# Altium PCB Lily.PcbDoc
Units mm, origin at the board's own origin, x right, y up, seen from the top; angles counter-clockwise.
Board outline 70.74 x 108.65 mm, 2 copper layers (Top Layer, Bottom Layer); 12 components, 8 nets, 44 pads, 13 vias.
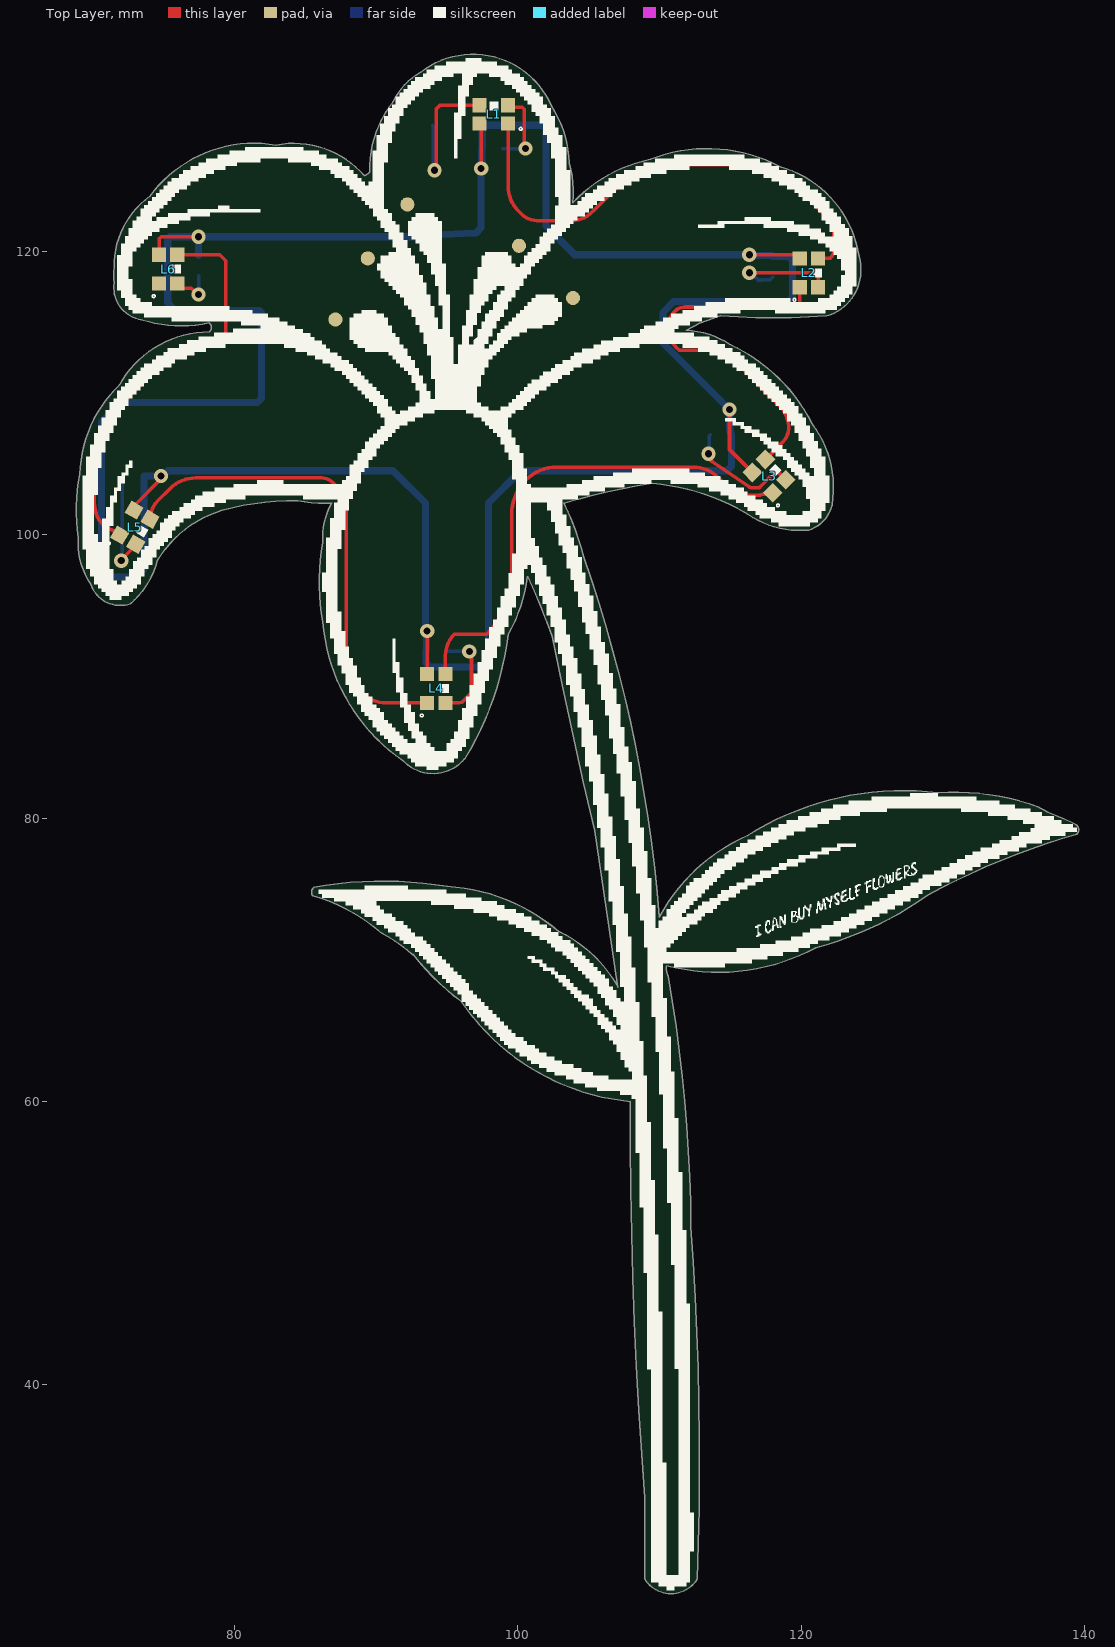
[diagram p0: Top Layer view]
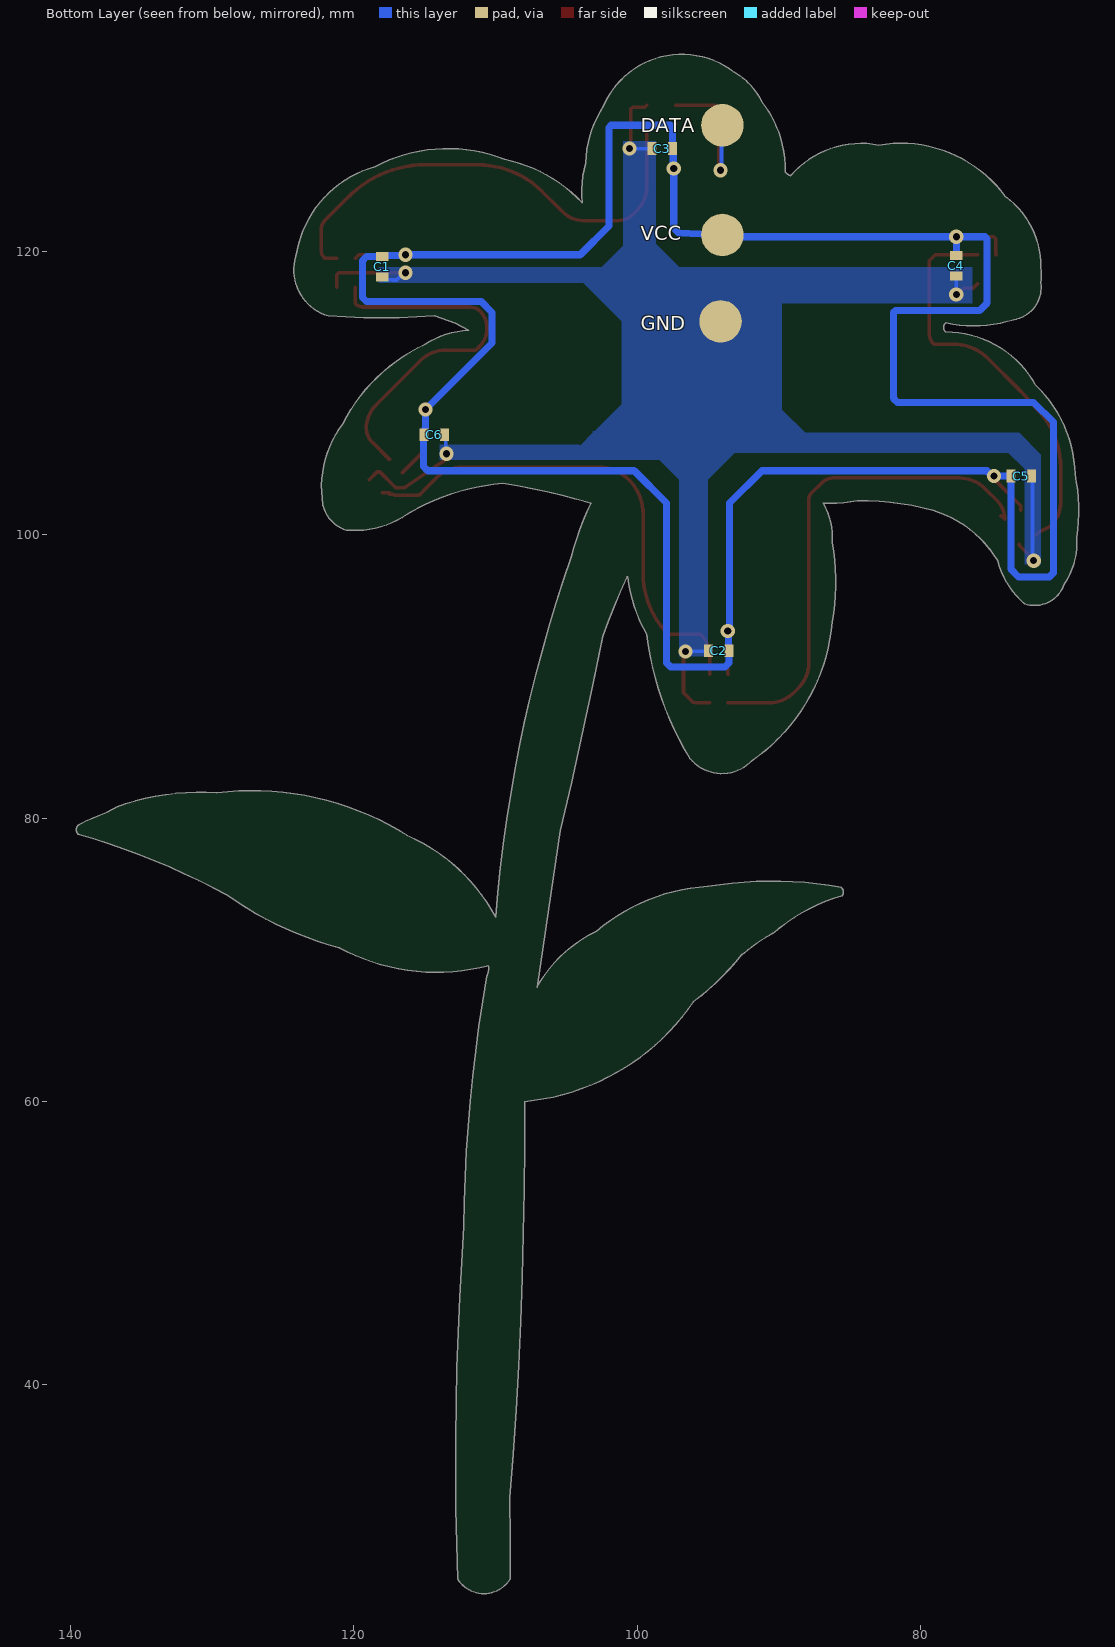
[diagram p1: Bottom Layer view, seen from below]

## Layer stack, top to bottom
Top Solder: solder mask 0.0102, Solder Resist, Dk 3.5
Top Layer: signal copper 0.0356
Dielectric 1: dielectric 0.32, FR-4, Dk 4.8
Bottom Layer: signal copper 0.0356
Bottom Solder: solder mask 0.0102, Solder Resist, Dk 3.5

## Board outline
85.518,74.523 cw(c85.862,74.774) 85.61,75.119 cw(c90.488,48.704) 94.996,75.184 cw(c94.223,61.915) 102.87,72.009 cw(c98.914,63.599) 107.061,68.072 cw(c1559.94,290.817) 105.41,79.121 cw(c553.166,184.365) 102.41,92.816 ccw(c55.463,76.322) 100.711,97.028 100.66,97.034 cw(c89.78,98.374) 99.314,92.964 cw(c77.758,95.55) 96.266,84.201 96.256,84.209 cw(c94.009,86.06) 91.896,84.057 cw(c99.341,94.896) 86.233,93.853 cw(c101.187,96.647) 86.233,99.441 cw(c91.109,99.802) 86.868,102.235 cw(c86.233,110.353) 84.458,102.406 ccw(c84.265,82.613) 79.121,101.727 ccw(c81.484,93.972) 74.549,98.171 cw(c68.669,99.727) 72.644,95.123 cw(c71.945,97.218) 69.85,96.52 cw(c74.267,99.465) 68.969,99.807 cw(c81.916,101.695) 69.087,104.267 cw(c78.156,104.025) 71.882,110.578 cw(c78.205,107.093) 78.203,114.312 ccw(c77.977,114.63) 78.203,114.947 cw(c76.264,124.185) 73.406,115.189 cw(c73.755,117.434) 71.51,117.783 cw(c75.692,118.364) 71.501,118.872 cw(c77.576,118.96) 74.012,123.881 cw(c81.408,118.473) 82.931,127.508 cw(c84.177,121.05) 89.154,125.349 ccw(c88.978,126.019) 89.532,125.603 cw(c97.395,125.729) 91.186,130.556 cw(c95.399,128.56) 93.129,132.632 cw(c96.84,127.906) 102.352,130.298 cw(c95.64,125.959) 103.627,126.238 cw(c96.218,124.142) 103.886,123.444 cw(c111.382,116.43) 109.347,126.492 cw(c113.371,116.367) 118.491,125.984 cw(c116.407,118.516) 124.079,119.634 cw(c120.841,118.681) 121.793,115.443 cw(c118.046,170.496) 114.3,115.443 ccw(c116.649,106.49) 111.887,114.427 cw(c111.688,108.534) 114.951,113.445 cw(c109.754,102.23) 120.777,107.823 cw(c114.769,103.326) 122.174,102.108 cw(c119.793,102.664) 120.523,100.33 cw(c119.904,106.753) 116.586,101.219 ccw(c108.198,88.185) 109.474,103.632 ccw(c117.061,55.275) 103.251,102.235 cw(c85.339,93.506) 104.648,98.425 cw(c8.909,65.06) 109.982,73.025 109.986,73.023 cw(c121.385,66.925) 116.217,78.775 cw(c127.144,61.524) 129.667,81.788 cw(c130.831,64.537) 136.779,80.772 136.807,80.745 cw(c131.939,71.49) 137.397,80.409 cw(c133.649,69.178) 139.446,79.502 cw(c139.129,79.184) 139.446,78.867 ccw(c153.411,29.75) 128.905,74.549 cw(c114.931,94.167) 121.031,70.866 cw(c114.163,83.49) 110.49,69.596 ccw(c111.697,69.406) 110.617,68.834 cw(c2.649,50.15) 112.217,51.149 cw(c-111.269,34.833) 112.649,26.289 cw(c110.807,27.432) 108.966,26.289 cw(c2666.348,27.872) 108.969,32.024 cw(c437.638,58.08) 107.943,59.999 cw(c109.47,76.196) 96.012,67.056 cw(c106.803,81.484) 92.613,70.382 92.583,70.358 ccw(c84.091,60.62) 90.424,71.882 90.408,71.863 ccw(c81.975,62.185)

## Design rules (kind name [scope] priority, off if disabled: settings)
Clearance [All] p1: gap=0.254 ignorepadtopadclearanceinfootprint=FALSE except(0: Arc-Hole Track-Hole SMDPad-Hole THPad-Hole Via-Hole Fill-Hole Poly-Hole Region-Hole Text-Hole)
PolygonConnect [All] p1: connectstyle=Direct reliefconductorwidth=0.254 reliefentries=4 polygonreliefangle="90 Angle" airgapwidth=0.254
RoutingVias [All] p1: holewidth=0.711 width=1.27 viastyle="Through Hole" minholewidth=0.711 minwidth=1.27 maxholewidth=0.711 maxwidth=1.27
SolderMaskExpansion [All] p1: expansion=0.102 istentingtop=FALSE
Width [All] p1: maxlimit=2 minlimit=0.254 preferedwidth=0.254
30 further rules are at their usual default settings.

## Components (designator, comment, footprint, x,y, rotation, side; value= is the part's Value field where it differs from the comment)
C1 "Cap-NP" CC1608-0603 117.983,118.91 r270 bottom value=0.1uF
C2 "Cap-NP" CC1608-0603 94.234,91.821 r0 bottom value=0.1uF
C3 "Cap-NP" CC1608-0603 98.209,127.254 r0 bottom value=0.1uF
C4 "Cap-NP" CC1608-0603 77.47,118.999 r270 bottom value=0.1uF
C5 "Cap-NP" CC1608-0603 72.898,104.14 r180 bottom value=0.1uF
C6 "Cap-NP" CC1608-0603 114.3,107.061 r180 bottom value=0.1uF
L1 "WS2812B-2020" WS2812B-2020 98.298,129.667 r0 top
L2 "WS2812B-2020" WS2812B-2020 120.538,118.49 r270 top
L3 "WS2812B-2020" WS2812B-2020 117.729,104.14 r315 top
L4 "WS2812B-2020" WS2812B-2020 94.234,89.154 r270 top
L5 "WS2812B-2020" WS2812B-2020 72.971,100.538 r240 top
L6 "WS2812B-2020" WS2812B-2020 75.311,118.745 r270 top

## Footprints (in the part's own frame and the unit in brackets; to place one, negate y for a bottom-side part, rotate by r counter-clockwise, add the part's x,y. Pads: shape width x height; smd on the part's side, far side on the other; paste and mask are expansions set on the pad)
CC1608-0603 [mm]
  rect 0.635x0.9 smd: 1(-0.724,0) 2(0.724,0)
  body extent -0.8,-0.4 0.8,0.4, height 0.3
WS2812B-2020 [mm]
  rect 1x1 smd: 1(1.015,-0.65) 2(1.015,0.65) 3(-1.015,0.65) 4(-1.015,-0.65)
  silkscreen extent -0.3,-1.12 2,0.9, body extent -1.1,-1 1.1,1, height 0.84

## Part data
C1 C2 C3 C4 C5 C6: "CAP,CER,4.7UF,10%,25V,X5R,0805"
L1 L2 L3 L4 L5 L6: "LED; SMD; 2020; RGB; 2x2x0.84mm; 3.7Ã·5.3V; Lens: transparent; 2kHz", Package=None, Availability="In Stock", Check_prices=https://www.snapeda.com/parts/WS2812B2020/Worldsemi/view-part/?ref=eda, MF=WorldSemi, MP=WS2812B2020, Price=None, SnapEDA_Link=https://www.snapeda.com/parts/WS2812B2020/Worldsemi/view-part/?ref=snap

## Free pads (board coordinates)
  round 1 smd: 2(87.122,115.189) 2(89.408,119.507) 2(92.202,123.317) 2(100.076,120.396) 2(103.886,116.713)
  round 3 smd far side: 2(93.98,121.158) 2(93.98,128.905) 2(94.107,115.062)

## Via types
v1: diameter 1, hole 0.5, Top Layer to Bottom Layer, tented both sides, 13 vias

## Nets (pads, with @x,y where several pads share a name; then routed paths per layer and width w, separated by ;. In a path a pad name is that pad's centre, name@x,y a point inside that pad or via, vN(x,y) a via of type N, cw(c..) or ccw(c..) an arc to the next point about the centre after c; other vN are vias at no path point)
GND: C1.2 C2.2 C3.2 C4.2 C5.2 C6.2 L1.2 L2.2 L3.2 L4.2 L5.2 L6.2 pad.2@94.107,115.062 | length 39.4
  Top Layer w0.254: v1(72.009,98.171) 72.009,98.244 73.026,99.261 L5.2 ; L6.2 76.294,117.397 76.948,117.397 77.378,116.967 v1(77.47,116.967) ; L4.2 95.677,88.139 ccw(c95.677,89.87) 96.057,88.181 96.571,88.695 ; 96.571,88.695 96.726,88.85 96.726,89.068 96.726,91.248 96.714,91.26 96.714,91.627 v1(96.571,91.77) ; L1.2 99.455,130.175 100.308,130.175 100.457,130.026 100.457,127.324 v1(100.527,127.254) ; v1(113.453,105.717) 113.596,105.574 113.596,105.277 113.668,105.203 ccw(c113.85,105.38) 113.707,105.17 116.338,103.376 ccw(c116.552,103.691) 116.552,103.31 116.922,103.31 ccw(c116.921,103.565) 117.1,103.384 118.147,104.431 118.357,104.431 L3.2 ; v1(116.332,118.491) 121.039,118.491 121.188,118.342 L2.2
  Bottom Layer w0.254: v1(72.009,98.171) 72.092,98.254 72.092,104.057 C5.2 ; v1(77.47,116.967) C4.2 ; C2.2 95.009,91.77 v1(96.571,91.77) ; C3.2 v1(100.527,127.254) ; v1(113.453,105.717) 113.515,105.778 113.515,107 C6.2 ; v1(116.332,118.491) 116.459,118.491 116.967,117.983 117.221,117.983 117.234,117.996 117.792,117.996 C1.2
NetL1_1: L1.1 L2.3 | length 34.8
  Top Layer w0.254: L1.1 99.313,124.624 ccw(c101.853,124.624) 100.057,122.828 100.262,122.623 ccw(c101.346,123.707) 101.346,122.174 103.788,122.174 ccw(c103.788,124.191) 104.509,122.307 ccw(c103.788,124.191) 105.215,122.765 ccw(c102.861,125.621) 105.478,123.004 106.694,124.22 cw(c111.258,119.658) 111.258,126.111 115.401,126.111 cw(c114.859,118.32) 120.503,123.718 121.983,122.237 cw(c121.217,121.471) 122.301,121.471 122.301,120.12 cw(c121.434,120.12) 122.047,119.507 122.045,119.505 L2.3 L2.3@121.19,119.507
NetL1_3: L1.3 pad.2@93.98,128.905 | length 10.6
  Top Layer w0.254: v1@94.234,125.857 94.234,130.048 94.503,130.317 L1.3
  Bottom Layer w0.254: pad.2@93.98,128.905 94.043,128.841 94.043,125.793 v1(94.107,125.73)
NetL2_1: L2.1 L3.3 | length 26.4
  Top Layer w0.254: L3.3 118.696,106.543 ccw(c117.669,107.571) 119.118,107.45 ccw(c116.665,107.45) 118.399,109.185 115.298,112.286 ccw(c113.502,110.49) 113.514,113.03 ccw(c113.502,110.49) 113.502,113.03 111.379,113.03 111.117,113.292 cw(c112.396,114.571) 110.588,114.497 cw(c112.34,114.569) 110.993,115.691 cw(c111.82,115.002) 111.82,116.078 119.346,116.078 ccw(c119.347,116.817) 119.786,116.222 ccw(c119.634,116.426) 119.888,116.426 L2.1
NetL3_1: L3.1 L4.3 | length 35.4
  Top Layer w0.254: L4.3 94.884,91.459 cw(c97.021,91.459) 95.509,92.969 ; 95.51,92.97 97.796,92.97 ccw(c93.519,97.247) 99.568,97.247 ; 99.568,97.249 99.568,101.442 cw(c103.016,101.442) 100.578,103.88 cw(c102.739,101.719) 102.739,104.775 112.359,104.775 cw(c112.359,102.235) 114.155,104.031 114.935,103.251 115.263,102.891 ccw(c115.45,103.063) 115.388,102.817 ccw(c115.511,103.31) 115.511,102.802 117.026,102.802 ccw(c117.026,103.31) 117.236,102.847 cw(c117.341,102.616) 117.34,102.87 117.378,102.87 ccw(c117.376,103.124) 117.513,102.91 117.46,102.963 L3.1
NetL4_1: L4.1 L5.3 | length 35.2
  Top Layer w0.254: L5.3@74.338,101.351 L5.3 cw(c75.881,101.092) 74.58,102.393 75.456,103.269 cw(c77.252,101.473) 77.252,104.013 86.165,104.013 cw(c86.165,102.929) 86.931,103.695 87.704,102.923 cw(c87.271,102.489) 87.884,102.489 87.884,90.968 ccw(c90.424,90.968) 88.628,89.172 88.917,88.883 ccw(c90.713,90.679) 90.713,88.139 L4.1
NetL5_1: L5.1 L6.3 | length 28.8
  Top Layer w0.254: 70.104,104.787 70.104,102.257 ccw(c72.362,102.257) 70.746,100.681 70.747,100.679 ccw(c70.928,100.858) 70.785,100.648 ccw(c73.575,104.863) 71.584,100.217 cw(c71.246,99.426) 71.6,100.21 L5.1 ; 70.104,104.788 cw(c75.937,104.788) 71.813,108.913 72.071,109.171 cw(c81.877,101.349) 73.008,110.22 75.218,112.429 cw(c77.679,109.968) 77.679,113.448 78.941,113.448 ccw(c78.939,113.702) 79.138,113.544 ccw(c78.276,114.226) 79.375,114.226 79.375,119.349 78.964,119.76 L6.3
VCC: C1.1 C2.1 C3.1 C4.1 C5.1 C6.1 L1.4 L2.4 L3.4 L4.4 L5.4 L6.4 pad.2@93.98,121.158 | length 223.8
  Top Layer w0.254: L5.4 72.915,102.05 74.803,103.938 v1(74.803,104.14) ; L6.4 74.676,119.775 74.676,120.882 74.825,121.031 v1(77.47,121.031) ; L4.4 93.599,90.184 v1(93.599,93.218) ; L1.4 97.409,128.891 v1(97.409,125.857) ; v1(114.935,108.839) 114.935,106.015 L3.4 ; v1(116.332,119.761) 119.632,119.761 L2.4
  Bottom Layer w0.5: C4.1 v1(77.47,121.031) ; pad.2@93.345,121.031 v1(77.47,121.031) ; pad.2@93.98,121.158 97.028,121.285 97.409,121.666 v1(97.409,125.857) 97.447,125.895 97.447,127.216 C3.1 97.485,128.756 97.634,128.905 101.832,128.905 101.981,128.756 101.981,121.793 104.013,119.761 v1(116.332,119.761) 116.395,119.697 117.919,119.697 C1.1 119.087,119.634 119.38,119.341 119.38,116.752 119.087,116.459 110.998,116.459 110.236,115.697 110.236,113.538 v1(114.935,108.839) 114.935,107.554 114.956,107.532 114.956,107.261 115.024,107.193 C6.1 ; C6.1@115.062,107.023 115.062,104.814 114.769,104.521 100.203,104.521 97.917,102.235 97.917,90.971 97.624,90.678 93.803,90.678 93.51,90.971 C2.1 93.555,91.865 93.555,93.174 v1(93.599,93.218) 93.472,93.345 93.472,102.235 91.186,104.521 75.319,104.521 74.938,104.14 74.347,104.14 C5.1 73.622,97.575 73.075,97.028 70.905,97.028 70.612,97.321 70.612,107.95 72.009,109.347 81.622,109.347 81.915,109.64 81.915,115.675 81.766,115.824 75.819,115.824 75.289,116.354 75.289,120.882 75.438,121.031 v1(77.47,121.031)
pads on no net: L6.1

## Polygon pours and split planes (outlines as drawn)
no net on Top Solder (solid): 105.791,120.904 106.68,120.015 106.045,120.65
GND on Bottom Layer "GND_L02_P000" (solid, remove dead copper, pour order 0): 103.124,107.315 102.997,107.315 101.092,109.22 101.092,115.062 103.813,117.783 106.988,117.783 118.237,117.783 118.237,118.872 102.489,118.872 100.965,120.396 100.965,127.762 98.679,127.762 98.679,120.523 97.028,118.872 76.327,118.872 76.327,116.332 89.789,116.332 89.789,108.839 88.138,107.188 73.025,107.188 71.501,105.664 71.501,97.917 72.644,97.917 72.644,104.648 73.787,105.791 93.091,105.791 94.996,103.886 94.996,91.44 97.028,91.44 97.028,103.886 98.425,105.283 113.919,105.283 113.919,106.362 104.076,106.362 104.013,106.299 103.124,107.188

## Silkscreen, mask and mechanical layers (free items; w line width, h text height)
Top Overlay:
  drawing of 21 lines, arcs and shapes, not listed
Bottom Overlay:
  text "DATA" at 99.746,128.397 h1
  text "VCC" at 99.746,120.777 h1
  text "GND" at 99.746,114.427 h1
Mechanical 13:
  lines w0.254: 90.408,71.863 ccw(c81.975,62.185) 85.518,74.523 cw(c85.862,74.774) 85.61,75.119 cw(c90.488,48.705) 94.996,75.184 cw(c94.223,61.915) 102.87,72.009 cw(c98.914,63.599) 107.061,68.072 cw(c1559.968,290.821) 105.41,79.121 cw(c553.169,184.366) 102.41,92.816 ccw(c55.462,76.321) 100.711,97.028 ; 90.424,71.882 cw(c84.091,60.619) 92.583,70.358 ; 92.613,70.382 ccw(c106.803,81.483) 96.012,67.056 ccw(c109.47,76.196) 107.943,59.999 ccw(c437.638,58.081) 108.969,32.024 ccw(c2668.193,27.938) 108.966,26.289 ccw(c110.807,27.432) 112.649,26.289 ccw(c-111.269,34.833) 112.217,51.149 ccw(c2.649,50.15) 110.617,68.834 cw(c111.697,69.406) 110.49,69.596 ccw(c114.163,83.49) 121.031,70.866 ccw(c114.931,94.167) 128.905,74.549 cw(c153.411,29.75) 139.446,78.867 ccw(c139.129,79.184) 139.446,79.502 ccw(c133.649,69.178) 137.397,80.409 ccw(c131.937,71.488) 136.807,80.745 ; 96.256,84.209 cw(c94.009,86.06) 91.896,84.057 cw(c99.341,94.896) 86.233,93.853 cw(c101.187,96.647) 86.233,99.441 cw(c91.109,99.802) 86.868,102.235 cw(c86.233,110.353) 84.458,102.406 ccw(c84.264,82.613) 79.121,101.727 ccw(c81.484,93.972) 74.549,98.171 cw(c68.669,99.727) 72.644,95.123 cw(c71.946,97.218) 69.85,96.52 cw(c74.267,99.465) 68.969,99.807 cw(c81.916,101.695) 69.087,104.267 cw(c78.156,104.025) 71.882,110.578 cw(c78.205,107.093) 78.203,114.312 ccw(c77.977,114.63) 78.203,114.947 cw(c76.263,124.185) 73.406,115.189 cw(c73.755,117.434) 71.51,117.783 cw(c75.692,118.364) 71.501,118.872 cw(c77.576,118.96) 74.012,123.881 cw(c81.408,118.473) 82.931,127.508 cw(c84.177,121.05) 89.154,125.349 ccw(c88.978,126.019) 89.532,125.603 cw(c97.395,125.729) 91.186,130.556 cw(c95.399,128.56) 93.129,132.632 cw(c96.84,127.906) 102.352,130.298 cw(c95.64,125.959) 103.627,126.238 cw(c96.218,124.142) 103.886,123.444 cw(c111.382,116.43) 109.347,126.492 cw(c113.371,116.367) 118.491,125.984 cw(c116.407,118.516) 124.079,119.634 cw(c120.84,118.682) 121.793,115.443 cw(c118.046,170.496) 114.3,115.443 ccw(c116.65,106.489) 111.887,114.427 cw(c111.688,108.534) 114.951,113.445 cw(c109.754,102.23) 120.777,107.823 cw(c114.769,103.326) 122.174,102.108 cw(c119.793,102.664) 120.523,100.33 cw(c119.904,106.753) 116.586,101.219 ccw(c108.198,88.185) 109.474,103.632 ccw(c117.061,55.274) 103.251,102.235 cw(c85.339,93.506) 104.648,98.425 cw(c8.909,65.06) 109.982,73.025 ; 96.266,84.201 ccw(c77.758,95.55) 99.314,92.964 ccw(c89.78,98.374) 100.66,97.034 ; 109.986,73.023 cw(c121.385,66.925) 116.217,78.775 cw(c127.144,61.524) 129.667,81.788 cw(c130.831,64.537) 136.779,80.772